# Altium PCB PCB.PcbDoc
Units mil, origin at the board's own origin, x right, y up, seen from the top; angles counter-clockwise.
Board outline 5511.81 x 3543.31 mil, 2 copper layers (Top Layer, Bottom Layer); 98 components, 67 nets, 352 pads, 95 vias.
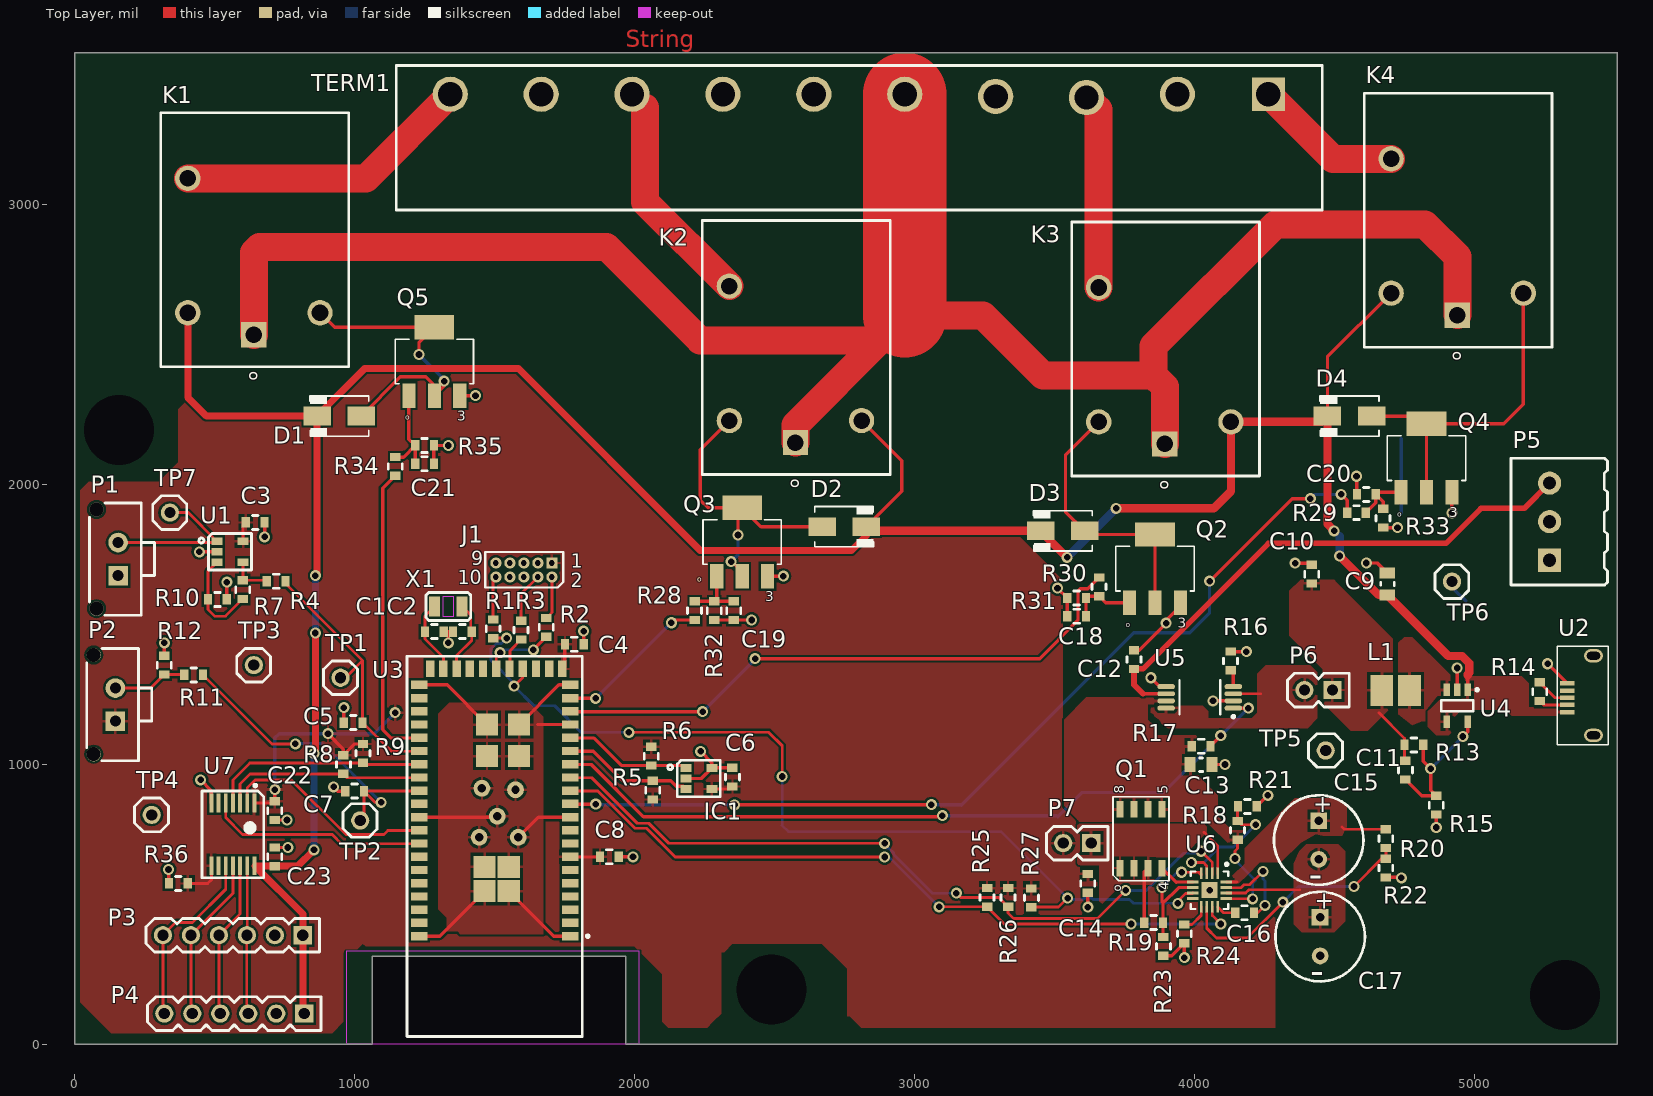
[diagram p0: Top Layer view]
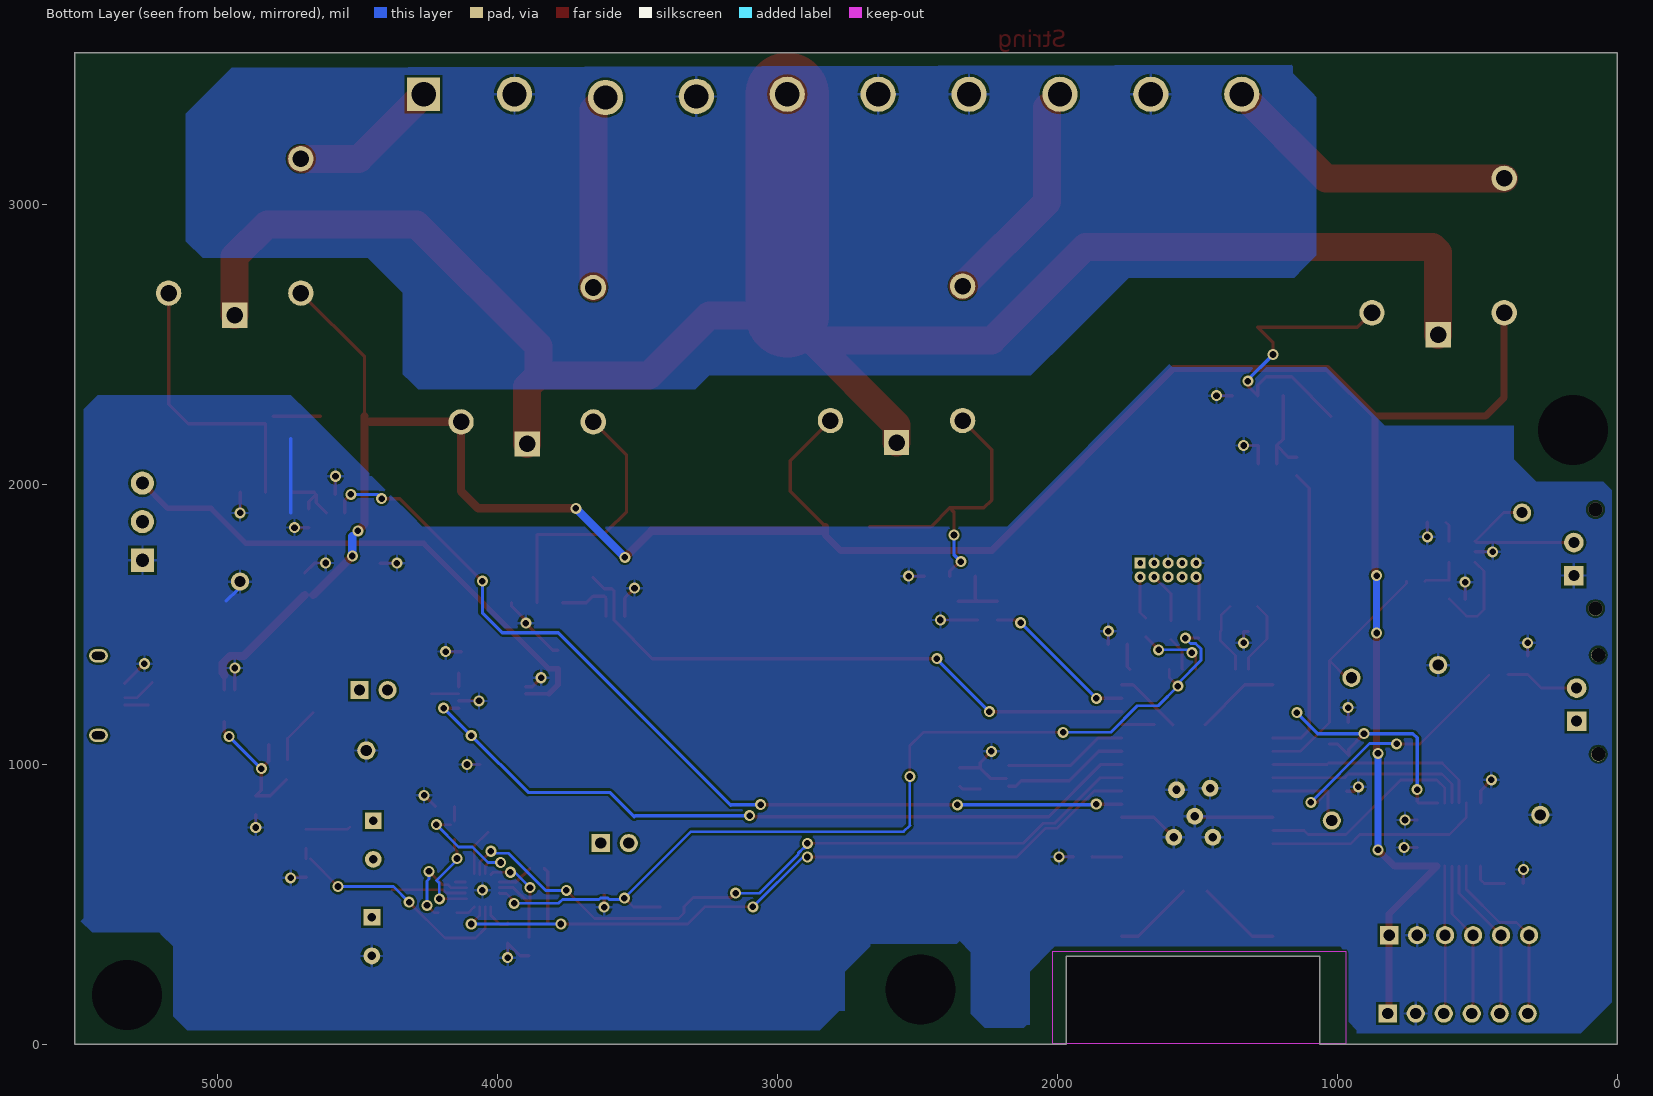
[diagram p1: Bottom Layer view, seen from below]

## Layer stack, top to bottom
Top Solder: solder mask 0.4, Solder Resist, Dk 3.5
Top Layer: signal copper 1.4
Dielectric1: dielectric 12.6, FR-4, Dk 4.8
Bottom Layer: signal copper 1.4
Bottom Solder: solder mask 0.4, Solder Resist, Dk 3.5

## Board outline
0,0 1062.99,0 1062.99,314.96 1968.5,314.96 1968.5,0 5511.81,0 5511.81,3543.31 0,3543.31 0,0

## Design rules (kind name [scope] priority, off if disabled: settings)
Clearance Mounting_Holes [InNet('No Net')] p1: gap=20
Clearance [All] p2: gap=8 except(6: SMDPad-SMDPad)
FabricationTestPointUsage TestPointUsage [All] p1: valid=0 allowmultiple=FALSE
FabricationTestpoint Testpoint [All] p1: side=3 testpointundercomponent=TRUE minsize=40 maxsize=100 preferedsize=60 minholesize=0 maxholesize=40 preferedholesize=32 testpointgrid=1 allowsidetop=TRUE allowsidebottom=TRUE usegrid=TRUE gridtolerance=0.01
HoleSize [All] p1: absolutevalues=TRUE maxlimit=250 minlimit=1 maxpercent=80.000 minpercent=20.000
MinimumAnnularRing [InNet('No Net')] p1: minimumring=50
PlaneClearance [InNet('No Net')] p1: clearance=20
PolygonConnect [All] p1: connectstyle=Relief reliefconductorwidth=10 reliefentries=4 polygonreliefangle="90 Angle" airgapwidth=10
RoutingVias [All] p1: holewidth=23.62 width=39.37 viastyle="Through Hole" minholewidth=23.62 minwidth=39.37 maxholewidth=23.62 maxwidth=39.37
SilkToSolderMaskClearance SilkscreenOverComponentPads [IsPad] p1: minsilkscreentomaskgap=10 clearancetoexposedcopper=TRUE
SolderMaskExpansion [All] p1: expansion=4
Width Width_Power [(InNet('3.3V') OR InNet('5V') OR InNet('VSW') OR InNet('VBACKUP') OR InNet('NetL1_1') OR InNet('NetC10_1') OR InNet('NetC12_1') OR InNet('NetK1_3') OR InNet('NetK2_3') OR InNet('NetK3_3') OR InNet('NetK4_3'))] p1: maxlimit=300 minlimit=10 preferedwidth=10 minimp=50.000000 maximp=50.000000 favimp=50.000000
Width Width_AC [(InNet('AC_LINE') OR InNet('AC_NEUTRAL'))] p2: maxlimit=500 minlimit=100 preferedwidth=100 minimp=50.000000 maximp=50.000000 favimp=50.000000
Width [All] p3: maxlimit=12 minlimit=8 preferedwidth=10
25 further rules are at their usual default settings.

## Classes and differential pairs
component class PAGE4_RELAYS: C18 C19 C20 C21 D1 D2 D3 D4 K1 K2 K3 K4 Q2 Q3 Q4 Q5 R28 R29 R30 R31 R32 R33 R34 R35 TERM1
component class PAGE3_POWER: C9 C10 C11 C12 C13 C14 C15 C16 C17 L1 P5 P6 P7 Q1 R13 R14 R15 R16 R17 R18 R19 R20 R21 R22 R23 R24 R25 R26 R27 TP3 TP4 TP5 TP6 U2 U4 U5 U6
component class PAGE2_ATMEL: C1 C2 C3 C4 C5 C6 C7 C8 C22 C23 IC1 J1 P1 P2 P3 P4 R1 R2 R3 R4 R5 R6 R7 R8 R9 R10 R11 R12 R36 TP1 TP2 TP7 U1 U3 U7 X1

## Components (designator, comment, footprint, x,y, rotation, side; value= is the part's Value field where it differs from the comment)
C1 "cap" 0603 1285,1475 r0 top
C2 "cap" 0603 1385,1475 r0 top
C3 "cap" 0603 645,1865 r0 top
C4 "cap" 0603 1785,1430 r0 top
C5 "cap" 0603 995,1150 r180 top
C6 "cap" 0603 2350,955 r90 top
C7 "cap" 0603 1000,905 r180 top
C8 "cap" 0603 1910,670 r0 top
C9 "cap" 0805 4690,1645 r90 top
C10 "cap" 0603 4420,1680 r90 top
C11 "cap" 0603 4755,980 r90 top
C12 "cap" 0603 3785,1375 r90 top
C13 "cap" 0805 4025,1000 r0 top
C14 "cap" 0603 3620,575 r270 top
C15 "Cap Pol" Cap8x11_5 4445,730 r270 top
C16 "cap" 0603 4180,470 r180 top
C17 "Cap Pol" Cap8x11_5 4450,385 r270 top
C18 "cap" 0603 3580,1530 r180 top
C19 "cap" 0603 2355,1550 r270 top
C20 "cap" 0603 4615,1965 r180 top
C21 "cap" 0603 1250,2075 r0 top
C22 "cap" 0603 715,835 r270 top
C23 "cap" 0603 715,670 r90 top
D1 "ds" SMAZ 945,2245 r180 top
D2 "ds" SMAZ 2750,1850 r0 top
D3 "ds" SMAZ 3530,1835 r180 top
D4 "ds" SMAZ 4555,2245 r180 top
IC1 "24LC04B" SOT-23-5 2230,950 r0 top
J1 "Header 10D" conn_10p_050mil 1705,1720 r180 top
K1 "G5LE-SPST" G5LE-SPST 965,2435 r90 top
K2 "G5LE-SPST" G5LE-SPST 2900,2050 r90 top
K3 "G5LE-SPST" G5LE-SPST 4220,2045 r90 top
K4 "G5LE-SPST" G5LE-SPST 5265,2505 r90 top
L1 "Inductor" LQH32C 4720,1265 r180 top
P1 "Header 2" conn_molex_2p_43650-0215 155,1675 r90 top
P2 "Header 2" conn_molex_2p_43650-0215 145,1155 r90 top
P3 "Header 6" HDR1X6 615,390 r180 top
P4 "Header 6" HDR1X6 620,110 r180 top
P5 "Header 3" CONN_PHOENIX_3P_1984620 5270,1730 r90 top
P6 "Header 2" HDR1X2 4494,1266 r180 top
P7 "Header 2" HDR1X2 3632,719 r180 top
Q1 "PMOS_POWER-8" SO-8 3810,735 r90 top
Q2 "NMOS-SOT-223-4" SOT-223-4 3860,1700 r0 top
Q3 "NMOS-SOT-223-4" SOT-223-4 2385,1795 r0 top
Q4 "NMOS-SOT-223-4" SOT-223-4 4830,2095 r0 top
Q5 "NMOS-SOT-223-4" SOT-223-4 1285,2440 r0 top
R1 "Res" 0603 1495,1485 r90 top
R2 "Res" 0603 1685,1490 r90 top
R3 "Res" 0603 1595,1480 r90 top
R4 "Res" 0603 720,1655 r0 top
R5 "Res" 0603 2065,908.46 r270 top
R6 "Res" 0603 2060,1030 r90 top
R7 "Res" 0603 600,1625 r90 top
R8 "Res" 0603 960,1000 r90 top
R9 "Res" 0603 1030,1040 r90 top
R10 "Res" 0603 510,1590 r180 top
R11 "Res" 0603 425,1320 r0 top
R12 "Res" 0603 320,1355 r270 top
R13 "Res" 0603 4785,1070 r180 top
R14 "Res" 0603 5235,1260 r270 top
R15 "Res" 0603 4865,855 r90 top
R16 "Res" 0603 4130,1370 r90 top
R17 "Res" 0603 4025,1065 r180 top
R18 "Res" 0603 4155,765 r270 top
R19 "Res" 0603 3855,435 r180 top
R20 "Res" 0603 4685,735 r90 top
R21 "Res" 0603 4190,850 r180 top
R22 "Res" 0603 4685,630 r90 top
R23 "Res" 0603 3890,350 r90 top
R24 "Res" 0603 3965,395 r90 top
R25 "Res" 0603 3260,525 r90 top
R26 "Res" 0603 3335,525 r90 top
R27 "Res" 0603 3418.35,523.82 r90 top
R28 "Res" 0603 2215,1550 r90 top
R29 "Res" 0603 4580,1900 r0 top
R30 "Res" 0603 3660,1635 r270 top
R31 "Res" 0603 3580,1595 r0 top
R32 "Res" 0603 2285,1550 r90 top
R33 "Res" 0603 4675,1880 r90 top
R34 "Res" 0603 1145,2065 r90 top
R35 "Res" 0603 1250,2140 r180 top
R36 "Res" 0603 370,575 r0 top
TERM1 "BARR-STRP-10" BARRIER-STRP-10 4265,3395 r180 top
TP1 "Header 1" HDR1 950,1310 r90 top
TP2 "Header 1" HDR1 1020,800 r90 top
TP3 "Header 1" HDR1 640,1355 r90 top
TP4 "Header 1" HDR1 275,820 r90 top
TP5 "Header 1" HDR1 4470,1050 r90 top
TP6 "Header 1" HDR1 4921.26,1653.54 r90 top
TP7 "Header 1" HDR1 340,1900 r90 top
U1 "MCP6V31U" SOT-23-5 555,1760 r0 top
U2 "USB_MicroB" ZX62WD1-B-5PC 5480,1085 r90 top
U3 "ATSAMW25H18-MR210PA" ATSAMW25H18-MR210PA 1770,1371 r180 top
U4 "LTC3406A" TSOT-23-5 4940,1210 r270 top
U5 "TPS2113A" TSSOP-8 4020,1240 r180 top
U6 "LTC3226" WFQFN-16 4055,551 r270 top
U7 "TXS0104EPWR" TSSOP-14 565,750 r270 top
X1 "crystal" FC-13F 1335,1565 r0 top

## Footprints (in the part's own frame and the unit in brackets; to place one, negate y for a bottom-side part, rotate by r counter-clockwise, add the part's x,y. Pads: shape width x height; smd on the part's side, far side on the other; paste and mask are expansions set on the pad)
0603 [mm] "0603"
  rect 0.75x0.95 smd: 1(-0.85,0) 2(0.85,0)
  silkscreen extent -0.25,-0.64 0.25,0.64, body extent -0.85,-0.45 0.85,0.45, height 0.81
0805 [mm] "0805 Chip, IPC Medium Density"
  rect 1x1.4 smd: 1(-1,0) 2(1,0)
  silkscreen extent -0.15,-0.63 0.15,0.6, body extent -1.07,-0.7 1.08,0.7, height 0.65
ATSAMW25H18-MR210PA [mm] "Atmel ATSAMW25H18-MR210PA"
  rect 2x2 smd: 0(4.619,5.809) 0(4.619,8.664) 0(5.567,20.923) 0(5.567,18.706) 0(7.543,8.664) 0(7.543,5.809) 0(7.749,18.706) 0(7.749,20.923)
  rect 1.5x0.754 smd mask+0.076: 1(0,24.998) 2(0,23.798) 3(0,22.598) 4(0,21.398) 5(0,20.198) 6(0,18.998) 7(0,17.798) 8(0,16.598) 9(0,15.398) 10(0,14.198) 11(0,12.998) 12(0,11.798) 13(0,10.598) 14(0,9.398) 15(0,8.198) 16(0,6.998) 17(0,5.798) 18(0,4.598) 19(0,3.398) 20(0,2.198) 32(13.7,2.198) 33(13.7,3.398) 34(13.7,4.598) 35(13.7,5.798) 36(13.7,6.998) 37(13.7,8.198) 38(13.7,9.398) 39(13.7,10.598) 40(13.7,11.798) 41(13.7,12.998) 42(13.7,14.198) 43(13.7,15.398) 44(13.7,16.598) 45(13.7,17.798) 46(13.7,18.998) 47(13.7,20.198) 48(13.7,21.398) 49(13.7,22.598) 50(13.7,23.798) 51(13.7,24.998)
  rect 0.754x1.5 smd mask+0.076: 21(0.7,0.75) 22(1.9,0.75) 23(3.1,0.75) 24(4.3,0.75) 25(5.5,0.75) 26(6.7,0.75) 27(7.9,0.75) 28(9.1,0.75) 29(10.3,0.75) 30(11.5,0.75) 31(12.7,0.75)
  silkscreen extent -1.73,-0.4 14.8,34.1, body extent -0.8,-0.07 14.54,33.7, height 1.35
BARRIER-STRP-10 [mm]
  rect 3x3 hole 2.2: 1(0,0)
  round 3.2 hole 2.2: 2(8.25,0) 3(16.5,0.3) 4(24.75,0.2) 5(33,0) 6(41.25,0) 7(49.5,0) 8(57.75,0) 9(66,0) 10(74.25,0)
  silkscreen extent -4.9,-2.6 79.15,10.5
Cap8x11_5 [mil] "big cap"
  rect 60x60 / inner round 60 / far side rect 60x60 hole 30: 1(-69,0)
  round 60 hole 30: 2(69,0)
  silkscreen extent -160,-160 160,160, body extent -158,-158 157,156, height 453
conn_10p_050mil [mil] "Connector; Header; 5x2 Position"
  rect 40x40 hole 20: 1(0,0)
  round 40 hole 20: 2(0,50) 3(50,0) 4(50,50) 5(100,0) 6(100,50) 7(150,0) 8(150,50) 9(200,0) 10(200,50)
  silkscreen extent -40,-39 238,88, body extent -10,-10 10,10, height 300
conn_molex_2p_43650-0215 [mil]
  round 51 hole 50 unplated: 0(-118.11,77.17) 0(236.22,77.17)
  rect 70x70 hole 39.37 paste+2.56 mask+3: 1(0,0)
  round 70 hole 39.37 paste+2.56 mask+3: 2(118.11,0)
  silkscreen extent -142,-130 260,102, body extent -131,-122 249,97, height 392
CONN_PHOENIX_3P_1984620 [mm] "3 Pin Terminal Block"
  rect 2.1x2.1 / inner round 2.1 / far side rect 2.1x2.1 hole 1.2: 1(0,0)
  round 2.1 hole 1.2: 2(3.5,0) 3(7,0)
  silkscreen extent -2.25,-5.25 9.25,3.5, body extent -1.73,-4.55 9.35,3.05, height 9.42
FC-13F [mm] "Crystal Oscillator"
  rect 1x1.8 smd: 1(-1.25,0) 2(1.25,0)
  Top Layer keep-out region: -0.508,-0.889 0.508,-0.889 0.508,0.889 -0.508,0.889
  silkscreen extent -2.03,-1.27 2.03,1.27, body extent -1.6,-0.8 1.7,0.8, height 0.6
G5LE-SPST [mm] "RELAY"
  rect 2.3x2.3 hole 1.5: 1(2.55,8.25)
  round 2.3 hole 1.5: 2(4.55,14.25) 3(16.75,14.25) 5(4.55,2.25)
  silkscreen extent -0.35,-0.35 22.7,16.7, body extent -0.1,-0.1 22.4,16.4, height 11
HDR1 [mil]
  round 65 hole 40: 1(0,0)
  silkscreen extent -60,-60 60,61, body extent -50,-50 50,50, height 300
HDR1X2 [mil]
  rect 65x65 hole 40: 1(0,0)
  round 65 hole 40: 2(100,0)
  silkscreen extent -60,-60 160,60, body extent -50,-50 150,50, height 300
HDR1X6 [mil] "Header, 6 pos."
  rect 65x65 hole 40: 1(-200,0)
  round 65 hole 40: 2(-100,0) 3(0,0) 4(100,0) 5(200,0) 6(300,0)
  silkscreen extent -260,-60 360,60, body extent -250,-50 350,50, height 300
LQH32C [mm] "Chip Inductor, 2-Leads, Body 3.20x2.50mm, IPC Low Density"
  rect 2.08x2.82 smd: 1(-1.265,0) 2(1.265,0)
  body extent -1.75,-1.35 1.75,1.35, height 1.7
SMAZ [mm] "Slightly different SMA package"
  rect 2.5x1.7 smd paste+0 mask+0.076: 1(2,0) 2(-2,0)
  silkscreen extent -2.68,-1.83 2.68,1.83, body extent -2.78,-1.55 2.78,1.55, height 2.3
SO-8 [mil]
  rect 59x24 smd paste+0 mask+3: 1(-105,75) 2(-105,25) 3(-105,-25) 4(-105,-75) 5(105,-75) 6(105,-25) 7(105,25) 8(105,75)
  silkscreen extent -150,-100 150,100, body extent -118,-96 118,96, height 70
SOT-23-5 [mm] "5 Pin SOT23"
  rect 1x0.7 smd paste+0 mask+0.076: 1(-1.185,0.95) 2(-1.185,0) 3(-1.185,-0.95) 4(1.185,-0.95) 5(1.185,0.95)
  silkscreen extent -2.82,-1.65 1.95,1.65, body extent -1.3,-1.45 1.3,1.45, height 1.45
SOT-223-4 [mil]
  rect 47x87 smd paste+0 mask+3: 1(-91,-122) 2(0,-122) 3(91,-122)
  rect 142x87 smd paste+0 mask+3: 4(0,122)
  silkscreen extent -140,-80 140,80, body extent -132,-136 132,141, height 71
TSOT-23-5 [mm] "SOT23, 5-Leads, Body 2.90x2.80mm, Pitch 0.95mm, IPC Low Density"
  rect 1.15x0.6 smd: 1(-1.45,0.95) 2(-1.45,0) 3(-1.45,-0.95) 4(1.45,-0.95) 5(1.45,0.95)
  silkscreen extent -1.57,-1.45 0.5,1.93, body extent -0.87,-1.45 0.87,1.45, height 1
TSSOP-8 [mm] "TSOP, 8-Leads, Body 3.00x4.40mm, Pitch 0.65mm, Thermal Pad 2.40x1.65mm, IPC Low Density"
  oval 1.6x0.45 smd: 1(-3.05,0.975) 2(-3.05,0.325) 3(-3.05,-0.325) 4(-3.05,-0.975) 5(3.05,-0.975) 6(3.05,-0.325) 7(3.05,0.325) 8(3.05,0.975)
  silkscreen extent -3.18,-1.55 1.85,1.87, body extent -2.25,-1.55 2.25,1.55, height 1.2
TSSOP-14 [mm] "14 Pin TSSOP"
  rect 1.7x0.35 smd: 1(-2.85,1.95) 2(-2.85,1.3) 3(-2.85,0.65) 4(-2.85,0) 5(-2.85,-0.65) 6(-2.85,-1.3) 7(-2.85,-1.95) 8(2.85,-1.95) 9(2.85,-1.3) 10(2.85,-0.65) 11(2.85,0) 12(2.85,0.65) 13(2.85,1.3) 14(2.85,1.95)
  silkscreen extent -4.57,-2.79 3.94,2.79, body extent -2.25,-2.55 2.25,2.55, height 1.2
WFQFN-16 [mm] "QFN, 16-Leads, Body 3.00x3.00mm, Pitch 0.50mm, Thermal Pad 1.45x1.45mm, IPC Low Density"
  rect 1.05x0.25 smd: 1(-1.525,0.75) 2(-1.525,0.25) 3(-1.525,-0.25) 4(-1.525,-0.75) 9(1.525,-0.75) 10(1.525,-0.25) 11(1.525,0.25) 12(1.525,0.75)
  rect 0.25x1.05 smd: 5(-0.75,-1.525) 6(-0.25,-1.525) 7(0.25,-1.525) 8(0.75,-1.525) 13(0.75,1.525) 14(0.25,1.525) 15(-0.25,1.525) 16(-0.75,1.525)
  rect 1.45x1.45 smd: 17(0,0)
  silkscreen extent -2.47,-1.7 1.7,1.7, body extent -1.55,-1.55 1.55,1.55, height 0.8
ZX62WD1-B-5PC [mm] "Waterproof USB Micro B"
  oval 1.2x1.7 hole 0.7 slot 1.2 at 90 deg: 0(0.49,1.35) 0(7.71,1.35)
  rect 0.4x1.3 smd: 1(2.6,3.73) 2(3.25,3.73) 3(3.9,3.73) 4(4.55,3.73) 5(5.2,3.73)
  silkscreen extent -0.35,0 8.57,4.62

## Part data
C1 C2: library part EXC143, "CAP CER 8.2PF 50V NP0 0603"
C3 C5 C7 C12 C18 C19 C20 C21: library part ECM1045XQ, "CAP CER 0.1UF 50V 10% X7R 0603"
C4 C8 C10 C14: library part EXC142, "CAP CER 10UF 16V X5R 0603"
C6 C22 C23: library part EXC144, "CAP CER 1UF 35V X7R 0603"
C9 C13: library part ECC4702XR, "CAP 4.7uF 16V X7R 0805"
C11: library part EXC140, "CAP CER 22PF 100V NP0 0603"
C15 C17: library part EXC139, "CAP 1F 2.7V THROUGH HOLE"
C16: library part EXC141, "CAP CER 2.2UF 10V X7R 0603"
D1 D2 D3 D4: library part ED93, "DIODE SCHOTTKY 100V 1A DO214AC"
IC1: library part EXM2404ST, "IC SERIAL EEPROM 4K 2.5V SOT23-5"
J1: library part EKP115, "CONN HEADER 10POS 1.27MM GOLD T/H"
K1 K2 K3 K4: library part ELME53, "RELAY GEN PURPOSE SPST 16A 5V"
L1: library part EL48, "FIXED IND 2.2UH 790MA 97 MOHM"
P1 P2: library part EKP96, "CONN HEADER 2POS 3MM VERT GOLD"
P3 P4: library part ekp19, "CONN HEADER 6POS .330 tall, TIN"
P5: library part EKP73, "CONN TERM BLOCK T/H 3POS 3.5MM"
P6 P7: library part EKP117, "CONN HEADER VERT SGL 2POS GOLD"
Q1: library part E333, "MOSFET P-CH 20V 8A 8-SOIC"
Q2 Q3 Q4 Q5: library part EXS0413NT, "MOSFET N-CH 40V 1.7A SOT223"
R1: library part ER273, "RES 39 OHM 1% 1/10W 0603 SMD"
R2 R3: library part ERE0000JP, "RES 0.0 OHM 1/10W 0603 SMD"
R4 R11 R14: library part ER264, "RES 200 OHM 1% 1/10W 0603 SMD"
R5 R6 R8 R9: library part ERE2001FP, "RES 2.00K OHM 1/10W 1% 0603 SMD"
R7: library part ERE1003FP, "RES 100K OHM 1/10W 1% 0603 SMD"
R10: library part ERE1001BP, "RES 1.0K OHM 1/10W .1% 0603 SMD"
R12 R17 R31 R32 R33 R35 R36: library part ERE1002FP, "RES 10.0K OHM 1/10W 1% 0603 SMD"
R13: library part ER265, "RES 1M OHM 1% 1/10W 0603 SMD"
R15: library part ER266, "RES 221K OHM 1% 1/10W 0603 SMD"
R16: library part ERE5230BP, "RES 523 OHM 1/10W .1% 0603 SMD"
R18: library part ER268, "RES 1.74M OHM 1% 1/10W 0603 SMD"
R19 R25 R26 R27: library part ER270, "RES 255K OHM 1% 1/10W 0603 SMD"
R20: library part ER272, "RES 3.83M OHM 1% 1/10W 0603 SMD"
R21 R22: library part ER269, "RES 1.24M OHM 1% 1/10W 0603 SMD"
R23: library part ER271, "RES 80.6K OHM 1% 1/10W 0603 SMD"
R24: library part ER267, "RES 33.2K OHM 1% 1/10W 0603 SMD"
R28 R29 R30 R34: library part ERE1001FP, "RES 1.00K OHM 1/10W 1% 0603 SMD"
TERM1: library part EKP113, "CONN BARRIER STRP 10CIRC 0.325\""
TP1 TP2 TP3 TP4 TP5 TP6 TP7: library part ekp17, "CONN HEADER 1POS .330 tall, TIN"
U1: library part E326, "IC OPAMP ZRO-DRFT 300KHZ SC70-5"
U2: library part EKP114, "CONN RCPT MICRO USB B SPLASH PRF"
U3: library part E329, "RF TXRX MODULE WIFI TRACE ANT"
U4: library part E332, "IC REG BUCK ADJ 0.6A SYNC TSOT23"
U5: library part E331, "IC OR CTRLR SRC SELECT 8TSSOP"
U6: library part E330, "IC 2CELL SUPERCAP CHARGE 16QFN"
U7: library part E334, "IC 4BIT NON-INV TRANSLTR 14TSSOP"
X1: library part EQX7, "CRYSTAL 32.768KHZ 7PF SMD"

## Free pads (board coordinates)
  round 0 hole 250 unplated: 0(157.48,2194.88) 0(2490.16,196.85) 0(5324.8,177.17)
  round 60 hole 30: 0(1455,915) 1(1575,910) 2(1510,815) 3(1445,740) 4(1585,740)

## Via types
v1: diameter 39.37, hole 23.62, Top Layer to Bottom Layer, 95 vias

## Nets (pads, with @x,y where several pads share a name; then routed paths per layer and width w, separated by ;. In a path a pad name is that pad's centre, name@x,y a point inside that pad or via, vN(x,y) a via of type N, cw(c..) or ccw(c..) an arc to the next point about the centre after c; other vN are vias at no path point)
3.3V: P6.2 U5.3 U5.8 | length 97.7
  Top Layer w10: U5.3 4237.8,1252.8
5V: C9.1 C23.1 D1.1 D2.1 D3.1 D4.1 K1.2 K2.5 K3.5 K4.2 P3.1 P4.1 U2.1 U4.1 U4.4 U7.14 | length 9845.2
  Top Layer w12: K2.5 2955,2085.55 2955,1976.26 D2.1 D2.1@2843.74,1835 ; D4.1@4455.39,2224.13 D4.1 4476.26,2456.42 K4.2 ; 4659.37,1605.63 C9.1 ; U4.1 4977.4,1318.23
  Top Layer w25: K1.2 403.98,2311.02 470,2245 D1.1 ; P4.1 815,115 P3.1 815,466.37 644.83,636.54 C23.1 796.54,636.54 v1(855,695) ; v1(855,1040) 860,1045 v1(860,1470) ; v1(860,1675) 866.26,1681.26 D1.1 ; D2.1 2828.74,1818.74 2775,1765 2235,1765 1585,2415 1036.26,2415 D1.1
  Top Layer w30: D2.1@2843.74,1835 D3.1 v1(3546.26,1740) ; v1(3721.26,1915) 4070,1915 4131.42,1976.42 K3.5 D4.1@4455.39,2224.13 ; D4.1 4476.26,1858.74 v1(4500,1835) ; v1(4520,1745) 4659.37,1605.63 ; C9.1 4907.94,1387.69 4957.68,1387.69 4982.69,1362.68 4982.69,1327.32 4977.4,1322.04 4977.4,1318.23
  Bottom Layer w12: v1(4500,1835) 4520,1815
  Bottom Layer w25: v1(855,695) v1(855,1040) ; v1(860,1470) v1(860,1675)
  Bottom Layer w30: v1(3546.26,1740) v1(3721.26,1915) ; v1(4520,1745) 4520,1815
AC_LINE: K1.1 K2.1 K3.1 K4.1 TERM1.5 | length 6951.2
  Top Layer w100: K1.1 640.2,2830.2 660,2850 1900,2850 2235,2515 2876.57,2515 ; K2.1 2575.2,2213.62 2876.57,2515 ; K3.1 3895.2,2349.8 3855,2390 ; K4.1 4940.2,2814.8 4825,2930 4290,2930 3855,2495 3855,2390 ; 2876.57,2515 2965.79,2604.21 3245.79,2604.21 3460,2390 3855,2390
  Top Layer w300: 2965.79,2604.21 TERM1.5
AC_NEUTRAL: TERM1.2 TERM1.4 TERM1.6 TERM1.7 TERM1.9
GND: C1.2 C2.1 C3.2 C4.2 C5.2 C6.2 C7.2 C8.2 C9.2 C10.2 C12.2 C13.2 C14.2 C17.2 C18.2 C19.2 C20.2 C21.2 C22.2 C23.2 IC1.2 IC1.5 J1.3 J1.5 J1.9 P1.1 P3.2 P4.2 P5.1 pad.0@1455,915 pad.1 pad.2 pad.3 pad.4 Q2.3 Q3.3 Q4.3 Q5.3 R10.1 R12.1 R15.1 R16.2 R21.1 R22.1 R23.1 R24.1 R31.1 R32.1 R33.1 R35.1 R36.1 TP3.1 TP4.1 TP5.1 TP6.1 U1.2 U2.5 U3.0 U3.1 U3.10 U3.17 U3.20 U3.32 U3.42 U3.51 U4.2 U5.2 U5.5 U6.17 U7.7 | length 4899.9
  Top Layer w12: R12.1 v1(320,1435) ; v1(335,625) 336.54,623.46 R36.1 ; v1(445,1760) U1.2 ; v1(450,945) 488.23,906.77 U7.7 ; R10.1 v1(543.46,1651.54) ; v1(678.46,1813.46) C3.2 ; C23.2 v1(761.54,703.46) ; C22.2 v1(758.46,801.54) ; v1(925,920) 940,905 C7.2 ; C5.2 v1(961.54,1203.46) ; U3.51 1304.49,386.83 U3.0@1464.92,547.26 ; U3.42 1507.02,812.02 pad.2 ; U3.32 1330.87,1284.46 U3.0@1473.03,1142.3 ; C21.2 R35.1 v1(1335,2140) ; C1.2 1335,1475 v1(1335,1435) ; Q5.3 v1(1432,2318) ; U3.0@1550.83,547.26 1711.26,386.83 U3.1 ; pad.4 1657.02,812.02 U3.10 ; U3.0@1588.15,1142.3 1730.32,1284.46 U3.20 ; 1654.54,1142.73 U3.17 ; C4.2 v1(1818.46,1476.54) ; C8.2 v1(1995,670) ; IC1.2 2239.25,950 IC1.5 ; v1(2236.22,1047.24) 2276.65,1006.81 IC1.5 ; R32.1 C19.2 v1(2418.46,1516.54) ; C6.2 2277.72,988.46 IC1.5 ; Q3.3 v1(2532,1673) ; v1(3511.54,1630) R31.1 C18.2 ; v1(3620,490) C14.2@3620,535.63 ; C12.2 3803.46,1408.46 v1(3900,1505) 3900,1515 3951,1566 Q2.3 ; v1(3845,1310) 3876.61,1278.39 U5.5 ; R23.1 3920,316.54 R24.1 v1(3965,310) ; C13.2 v1(4110,1000) ; v1(4067.2,1227.2) U5.2 ; R16.2 v1(4186.54,1403.46) ; R21.1 v1(4263.46,890) ; v1(4360.63,1719.37) C10.2@4420,1719.37 ; v1(4580,2030) 4581.54,2028.46 C20.2 ; v1(4615,1720) 4654.37,1720 C9.2 ; R33.1 v1(4726.54,1846.54) ; R22.1 4738.46,596.54 v1(4740,595) ; v1(4865,775) R15.1 ; v1(4921,1899) Q4.3 ; U4.2 v1(4940,1345) ; v1(5262.87,1360) U2.5
  Bottom Layer w12: 4740,1900 4740,2165 ; TP6.1@4930,1645 4930,1625.12 4970.47,1584.65 ; v1@4940,1339.55 v1(4940,1345)
  other v1: 4055,551
NetC1_1: C1.1 U3.30 X1.1 | length 265.9
  Top Layer w10: X1.1 1251.54,1530.75 C1.1 1251.54,1448.46 1317.24,1382.76 U3.30@1317.24,1340.47
NetC2_2: C2.2 U3.29 X1.2 | length 261.1
  Top Layer w10: U3.29@1364.49,1340.47 1364.49,1389.49 1418.46,1443.46 C2.2 1415,1478.46 1415,1534.21 X1.2
NetC10_1: C10.1 C11.2 L1.2 P6.1 R13.2 | length 206
  Top Layer w10: 4660,1185 4751.54,1093.46 R13.2 C11.2@4751.54,1016.93
NetC11_1: C11.1 R13.1 R15.2 U4.5 | length 557.6
  Top Layer w12: C11.1 4813.07,888.46 R15.2 4845,908.46 v1(4845,985) 4818.46,1011.54 R13.1 ; v1(4960,1100) 4977.4,1117.4 U4.5
  Bottom Layer w12: v1(4845,985) v1(4960,1100)
NetC12_1: C12.1 P5.3 U5.6 | length 1944.9
  Top Layer w12: 3817.2,1252.8 U5.6
  Top Layer w20: 3817.2,1252.8 3785,1285 C12.1 3816.54,1341.54 4265,1790 4900,1790 5025,1915 5179.41,1915 P5.3
NetC15_1: C15.1 R20.2 U6.16 | length 198
  Top Layer w10: U6.16 4152.53,580.53 ; 4528,777 4536.54,768.46 R20.2
NetC15_2: C15.2 C17.1 U6.14 | length 267.1
  Top Layer w10: U6.14 4184.05,541.16 4195.58,552.69 4377.31,552.69
NetC16_1: C16.1 U6.15 | length 333.7
  Top Layer w10: U6.15@4111.1,559.84 4168.16,559.84 4179.01,570.69 4198.69,570.69 v1(4246,618) ; C16.1 4226.11,470 v1(4253.06,496.94)
  Bottom Layer w10: v1(4246,618) 4246,591.06 4253.06,584 v1(4253.06,496.94)
NetC16_2: C16.2 U6.12 | length 70.7
  Top Layer w10: U6.12 4105.49,470 C16.2
NetC18_1: C18.1 Q2.1 R30.2 R31.2 | length 233
  Top Layer w12: C18.1 R31.2 3620,1601.54 R30.2 3683.54,1578 Q2.1
NetC19_1: C19.1 Q3.1 R28.2 R32.2 | length 233.3
  Top Layer w12: R28.2 R32.2 ; Q3.1 2294,1592.46 R32.2 ; C19.1 R32.2
NetC20_1: C20.1 Q4.1 R29.2 R33.2 | length 224.6
  Top Layer w12: R29.2 4648.46,1935 C20.1 4675,1938.46 R33.2 ; C20.1@4656.46,1973 Q4.1
NetC21_1: C21.1 Q5.1 R34.2 R35.2 | length 341.1
  Top Layer w12: R34.2 1175,2098.46 R35.2 ; Q5.1 1194,2162.54 R35.2 ; C21.1 R35.2
NetD1_2: D1.2 K1.5 Q5.2 Q5.4 | length 1124.5
  Top Layer w12: K1.5 928.55,2562 Q5.4 1230,2507 v1(1230,2465) ; D1.2 1163.74,2385 1255,2385 1285,2355 Q5.2 1320,2353 v1(1320,2370)
  Bottom Layer w12: v1(1230,2465) 1325,2370 v1(1320,2370)
NetD2_2: D2.2 K2.2 Q3.2 Q3.4 | length 1082.7
  Top Layer w12: K2.2 2235,2125.16 2235,1945 2263,1917 Q3.4 ; v1(2345.18,1724.82) 2350.18,1724.82 2385,1690 Q3.2 ; v1(2370,1820) 2370,1902 Q3.4 ; D2.2 2452,1850 Q3.4
  Bottom Layer w12: v1(2345.18,1724.82) 2370,1749.63 v1(2370,1820)
NetD3_2: D3.2 K3.2 Q2.2 Q2.4 | length 967.5
  Top Layer w12: K3.2 3540,2105.16 3540,1903.74 D3.2 3621.74,1822 Q2.4 Q2.2
NetD4_2: D4.2 K4.5 Q4.2 Q4.4 | length 1185.1
  Top Layer w12: D4.2 Q4.4@4802,2245 ; Q4.2 Q4.4 5107,2217 5176.42,2286.42 K4.5
NetIC1_1: IC1.1 R6.1 U3.16 | length 444.8
  Top Layer w12: U3.16@1770,1094.49 1855.51,1094.49 1953.46,996.54 R6.1 IC1.1@2174.21,996.54
NetIC1_3: IC1.3 R5.1 U3.15 | length 455.5
  Top Layer w12: U3.15@1770,1047.24 1852.76,1047.24 1958.07,941.93 R5.1 2129.95,941.93 2149.66,922.22 IC1.3@2173.72,922.22
NetJ1_2: J1.2 R2.2 | length 154.8
  Top Layer w10: R2.2 1705,1543.46 J1.2
NetJ1_4: J1.4 R3.2 | length 181.4
  Top Layer w10: R3.2 1595,1610 J1.4
NetJ1_10: J1.10 R1.2 | length 141.5
  Top Layer w10: R1.2 J1.10@1495,1660
NetK1_3: K1.3 TERM1.10 | length 1062.3
  Top Layer w100: K1.3 1041.22,3094.45 TERM1.10
NetK2_3: K2.3 TERM1.8 | length 763
  Top Layer w100: 2038.43,3347.95 2038.43,3010 K2.3
NetK3_3: K3.3 TERM1.3 | length 696.8
  Top Layer w100: TERM1.3 3658.98,3339.61 K3.3
NetK4_3: K4.3 TERM1.1 | length 534.5
  Top Layer w100: TERM1.1 4495.55,3164.45 K4.3
NetL1_1: L1.1 U4.3
NetP1_2: P1.2 TP7.1 U1.1 | length 559.9
  Top Layer w10: P1.2 U1.1@504.06,1793.11 ; TP7.1 405.75,1900 U1.1
NetP2_2: P2.2 R11.1 R12.2 | length 265.1
  Top Layer w10: P2.2 271.57,1273.11 R12.2 R11.1@390,1321.54
NetP3_3: P3.3 P4.3 U7.13 | length 523.3
  Top Layer w10: P4.3@615,115 P3.3 616.18,391.18 U7.13
NetP3_4: P3.4 P4.4 U7.12 | length 554.1
  Top Layer w10: P4.4@515,115 P3.4 590.59,465.59 U7.12
NetP3_5: P3.5 P4.5 U7.11 | length 584.9
  Top Layer w10: P4.5@415,115 P3.5 565,540 U7.11
NetP3_6: P3.6 P4.6 U7.10 | length 658
  Top Layer w10: P4.6 315,115 P3.6 360.5,435.5 420.5,435.5 539.41,554.41 U7.10
NetP7_1: P7.1 Q1.1 Q1.2 Q1.3 R19.2 U6.1 | length 367.7
  Top Layer w10: 4035.43,757.87 4084.53,708.78 U6.1
  Top Layer w12: R19.2 3821.54,616.54 Q1.3
NetQ1_4: Q1.4 U6.5 | length 129.9
  Top Layer w10: 3936.47,580.53 U6.5
  Top Layer w12: Q1.4 3935.47,579.53
NetR1_1: R1.1 R27.1 U3.24 U6.7 | length 3442.6
  Top Layer w10: R1.1 v1(1543.46,1451.54) ; v1(1570,1280) 1600.71,1310.71 U3.24@1600.71,1340.47 ; v1(1980,1115) 2480,1115 2528,1067 v1(2528,957) ; R27.1 3515.36,490.36 v1(3547.69,522.69) ; v1(3942,504) 3942,512.49 3968.91,539.39 3993.2,539.39 U6.7
  Bottom Layer w10: v1(1543.46,1451.54) 1524.61,1432.69 1506.46,1432.69 1487.31,1413.54 1487.31,1372.69 1570,1290 v1(1570,1280) 1640,1210 1715,1210 1810,1115 v1(1980,1115) ; v1(2528,957) 2528,782.88 2527.56,782.44 2550,760 3310.37,760 v1(3547.69,522.69) 3552.46,517.91 3601.68,517.91 3606.46,522.69 3633.54,522.69 3638.32,517.91 3740.87,517.91 3741.46,517.31 3768.54,517.31 3769.13,517.91 3783.04,504 v1(3942,504)
NetR2_1: R2.1 U3.26 | length 253.7
  Top Layer w10: U3.26@1506.22,1340.47 1506.22,1386.22 v1(1520,1400) ; v1(1638.46,1410) R2.1
  Bottom Layer w10: v1(1520,1400) 1530,1410 v1(1638.46,1410)
NetR3_1: R3.1 U3.25 | length 123.3
  Top Layer w10: U3.25@1553.46,1340.47 1555,1342.01 1555,1406.54 R3.1
NetR4_1: R4.1 R7.2 U1.4 | length 150.5
  Top Layer w10: R7.2 683.07,1658.46 R4.1 ; R7.2@601.65,1660.12 U1.4
NetR7_1: R7.1 R10.2 U1.3 | length 341
  Top Layer w10: U1.3 476.54,1690.79 R10.2 476.54,1553.46 500,1530 538.46,1530 R7.1
NetR14_1: R14.1 U2.3 | length 120.9
  Top Layer w10: R14.1 5289.92,1238.54 U2.3
NetR14_2: R14.2 U2.2 | length 84.6
  Top Layer w10: R14.2@5248.58,1212.95 U2.2
NetR16_1: R16.1 U5.4 | length 48.1
  Top Layer w12: U5.4 R16.1@4140.08,1326.46
NetR17_1: R17.1 U3.14 U5.1 | length 2770.4
  Top Layer w12: U3.14@1770,1000 1845,1000 2032.23,812.77 3096.24,812.77 v1(3100.39,816.93) ; R17.1@4058.46,1066.69 v1(4095,1103.23) ; U5.1 v1(4193.39,1201.61)
  Bottom Layer w12: v1(3100.39,816.93) 3508.61,816.93 3512.77,812.77 3600,900 3891.77,900 v1(4095,1103.23) v1(4193.39,1201.61)
NetR18_1: R18.1 R21.2 U6.3 | length 474.5
  Top Layer w10: v1(3990,650) 4033,650 4045.16,637.84 U6.3 ; R18.1@4168.46,785 v1(4220,785)
  Top Layer w12: R18.1 R21.2@4155,848.46
  Bottom Layer w10: v1(3990,650) 4035,650 4090,705 4140,705 v1(4220,785)
NetR19_1: R19.1 R23.2 U6.4 U6.6 | length 490.7
  Top Layer w10: 3885,506.93 v1(3885,560) ; 3945.84,560.84 U6.6 ; v1(3955,615) 4016.57,615 U6.4@4025.47,606.1
  Top Layer w12: R23.2 3888.46,385 R19.1 3888.46,503.46 3944.84,559.84
  Bottom Layer w10: v1(3885,560) 3955,630 v1(3955,615)
NetR20_1: R20.1 R22.2 U6.10 | length 871.3
  Top Layer w10: U6.10 4045.16,414.84 4080,380 4189,380 v1(4317,508) ; v1(4571,564) R22.2@4670.46,663.46 ; R22.2 R20.1
  Bottom Layer w10: v1(4317,508) 4373,564 v1(4571,564)
NetR24_2: R24.2 U6.9 | length 108.6
  Top Layer w10: R24.2 3992.46,428.46 4025.47,461.47 U6.9
  Top Layer w12: R24.2 R24.2@3965,433.43
NetR25_1: R25.1 U3.12 U6.11 | length 2596
  Top Layer w10: U3.12@1770,905.51 1869.03,905.51 2002.54,772 2043,772 2145.71,669.29 v1(2893.7,669.29) ; v1(3088.46,491.54) R25.1 3321.54,430 v1(3775,430) ; U6.11 4064.84,460.16 v1(4095,430)
  Bottom Layer w10: v1(2893.7,669.29) 2909.29,669.29 2910,670 v1(3088.46,491.54) ; v1(3775,430) v1(4095,430)
NetR26_1: R26.1 U3.13 U6.2 | length 2698.6
  Top Layer w10: U3.13@1770,952.76 1847.24,952.76 2010,790 2051,790 2122.5,718.5 v1(2893.7,718.5) ; v1(3150,540) 3165,525 3301.54,525 R26.1 3335,470 3355,450 3655,450 v1(3755,550) ; v1(4025,690) 4064.84,650.16 U6.2@4064.84,606.1
  Bottom Layer w10: v1(2893.7,718.5) 2883.96,718.5 2885.46,720 2903.48,701.98 2907.24,701.98 2926.39,682.83 2926.39,679.07 3065.46,540 v1(3150,540) ; v1(3755,550) 3828.78,550 3961.46,682.69 4017.69,682.69 v1(4025,690)
NetR28_1: R28.1 U3.19 | length 556
  Top Layer w12: U3.19 v1@1860.22,1237.22 ; v1@2131.54,1516.54 R28.1
  Bottom Layer w12: v1(1861.22,1236.22) v1(2131.54,1506.54)
NetR29_1: R29.1 U3.11 | length 3356.5
  Top Layer w12: U3.11@1770,858.27 v1(1861.73,858.27) ; v1(2358,856) v1@3060.72,856 ; v1(4055,1655) 4350,1950 v1(4415,1950) ; v1(4525,1965) 4546.54,1943.46 R29.1
  Bottom Layer w12: v1(1861.73,858.27) 1865,855 1866,856 v1(2358,856) ; v1(3061.02,856.3) 3166.07,856.3 3167.37,855 3783.69,1471.31 3983.69,1471.31 4055,1542.63 v1(4055,1655) ; v1(4415,1950) 4430,1965 v1(4525,1965)
NetR30_1: R30.1 U3.18 | length 2151
  Top Layer w12: U3.18@1770,1188.98 v1(2243.98,1188.98) ; v1(2431.1,1377.95) 3447.75,1377.95 3584.7,1514.9 3584.7,1619.5 3592.9,1627.7 3619.24,1627.7 R30.1
  Bottom Layer w12: v1(2243.98,1188.98) 2431.1,1376.1 v1(2431.1,1377.95)
NetR34_1: R34.1 U3.36 | length 1068.4
  Top Layer w12: R34.1 1100,1986.54 1100,1125 1130.51,1094.49 U3.36@1230.63,1094.49
PUMP_HALL_EFF: C5.1 R4.2 TP1.1 U3.37 | length 967.6
  Top Layer w10: R4.2 753.46,1646.54 1028.46,1371.54 ; TP1.1 966.93,1310 1028.46,1371.54 ; U3.37@1230.63,1047.24 1131.22,1047.24 C5.1 1028.46,1371.54
TM1640_DO: U3.43 U7.2 | length 766.8
  Top Layer w10: U7.2 616.18,916.18 645,945 773.78,945 968.78,750 1105,750 1118.78,763.78 U3.43@1230.63,763.78
TM1640_SCK: U3.44 U7.5 | length 781.8
  Top Layer w10: U7.5 539.41,810.59 600,750 920,750 953.46,716.54 U3.44@1230.63,716.54
VBACKUP: C3.1 C4.1 C6.1 C8.1 C14.1 C22.1 IC1.4 J1.1 P2.1 P7.2 R5.2 R6.2 R8.2 R9.2 R25.2 R26.2 R27.2 R36.2 U1.5 U3.7 U3.21 U7.1 U7.8 | length 1444.2
  Top Layer w10: R36.2 475,575 488.23,588.23 U7.8 ; U1.5 601.65,1855.12 C3.1
  Top Layer w12: U7.1 708.74,862.2 C22.1 v1(715,910) ; v1(905,1110) 960,1055 R8.2 1000,1073.46 R9.2 ; U3.21@1742.44,1340.47 1751.54,1349.57 C4.1 ; U3.7@1770,669.29 1875.83,669.29 C8.1 ; IC1.4 2341.06,912.6 C6.1
  Bottom Layer w12: v1(715,910) 715,1095 730,1110 v1(905,1110) 1070,1110 v1(1145,1185)
VSW: C13.1 Q1.5 Q1.6 Q1.7 Q1.8 R17.2 R18.2 U5.7 U6.13 | length 360.4
  Top Layer w10: U6.13@4111.1,520.47 4210.47,520.47 v1@4210,520 ; v1(4146,664) 4146,691 4155,700 R18.2 ; v1(4209.12,520) v1@4210,520 ; v1@4212,518 v1@4210,520
  Bottom Layer w10: v1(4146,664) 4141,664 4219,586 4209.12,576.12 v1(4209.12,520)
WATER_TEMP: C7.1 R11.2 TP2.1 U3.40 | length 1192.6
  Top Layer w10: R11.2 705,1073.46 v1(788.46,1073.46) ; TP2.1@1033.46,813.46 C7.1 ; v1(1095,865) 1073.46,865 C7.1 ; U3.40@1230.12,905 C7.1
  Bottom Layer w10: v1(788.46,1073.46) 790,1075 885,1075 v1(1095,865)
WTC6508_SCK: R8.1 U3.39 U7.3 | length 729
  Top Layer w10: U7.3 590.59,930.59 626.54,966.54 R8.1 973.78,952.76 U3.39@1230.63,952.76
WTC6508_SDA: R9.1 U3.38 U7.4 | length 777.1
  Top Layer w10: U7.4 565,945 625.7,1005.7 1030,1005.7 R9.1 1036.54,1000 U3.38@1230.63,1000
pads on no net: J1.6 J1.7 J1.8 P1.0 P2.0 P5.2 U2.0 U2.4 U3.2 U3.3 U3.4 U3.5 U3.6 U3.8 U3.9 U3.22 U3.23 U3.27 U3.28 U3.31 U3.33 U3.34 U3.35 U3.41 U3.45 U3.46 U3.47 U3.48 U3.49 U3.50 U6.8 U7.6 U7.9

## Polygon pours and split planes (outlines as drawn)
VBACKUP on Top Layer "VBACKUP" (solid, remove dead copper, pour order 14): 200,2010 100,2010 50,2010 20,1980 20,150 130,40 910,40 920,40 960,80 960,330 1000,330 1030,360 1040,350 1970,350 2000,350 2040,310 2100,250 2100,80 2120,60 2130,60 2260,60 2280,80 2310,110 2310,330 2320,330 2350,360 2660,360 2670,360 2740,290 2760,270 2760,100 2770,100 2810,60 4290,60 4290,550 4108.46,731.54 4044.44,795.56 3589.44,795.56 3589.44,797.58 3534.96,852.07 3530,857.03 3530,1170 3530,1660 3450,1740 3320,1870 3210,1870 2180,1870 1570,2480 1560,2480 1010,2480 1000,2470 850,2320 420,2320 390,2290 370,2270 370,2090 370,2080 300,2010
NetC15_2 on Top Layer "VSW" (solid, remove dead copper, pour order 42): 4400,715 4395,710 4390,705 4375,690 4355,645 4355,490 4355,430 4385,400 4500,400 4540,440 4540,655 4540,690 4520,710 4515,715 4425,715
NetC15_1 on Top Layer "VSW" (solid, remove dead copper, pour order 43): 4090,575 4135,575 4160,575 4190,605 4235,650 4290,650 4310,650 4380,720 4435,750 4460,745 4530,745 4540,770 4545,775 4545,850 4525,870 4515,880 4395,880 4360,880 4205,725 4180,700 4180,645 4140,605 4120,585 4090,585
NetC10_1 on Top Layer "VSW" (solid, remove dead copper, pour order 47): 4460,1340 4460,1220 4500,1180 4560,1120 4620,1120 4710,1210 4710,1320 4710,1450 4510,1650 4500,1660 4440,1660 4380,1660 4340,1620 4340,1520 4340,1460 4460,1340
3.3V on Top Layer "3V3" (solid, remove dead copper, pour order 49): 3850,1210 3845,1200 3845,1185 3855,1180 3860,1170 3875,1160 3885,1145 3905,1130 4000,1130 4405,1130 4440,1165 4440,1248 4440,1330 4415,1355 4260,1355 4255,1355 4230,1330 4225,1325 4225,1210 4225,1185 4210,1170 4205,1165 4050,1165 4050,1190 4030,1210
5V on Top Layer "5V" (solid, remove dead copper, pour order 50): 5380,1200 5390,1190 5390,1180 5385,1175 5290,1175 5135,1175 5125,1185 5115,1195 5005,1195 4955,1195 4940,1180 4925,1165 4925,1125 4925,1120 4915,1110 4910,1105 4865,1105 4845,1125 4835,1135 4835,1185 4835,1190 4850,1205 4875,1230 4955,1230 4955,1235 4965,1245 4965,1305 4975,1315 5165,1315 5170,1315 5190,1295 5195,1290 5195,1205 5210,1205 5215,1200 5310,1200
NetL1_1 on Top Layer "NetL1_1" (solid, remove dead copper, pour order 51): 4730,1340 4730,1190 4730,1180 4780,1140 4815,1155 4825,1155 4825,1190 4865,1240 4870,1245 4915,1245 4915,1320 4865,1370 4810,1425 4780,1455 4770,1455 4750,1455 4730,1435
VSW on Top Layer "VSW" (solid, remove dead copper, pour order 52): 4170,705 4195,730 4195,750 4185,760 4180,765 4135,765 4095,805 4085,815 4085,855 4085,890 4035,940 4020,955 4020,995 4020,1090 4005,1105 3855,1105 3855,1140 3845,1150 3835,1160 3835,1215 3935,1215 3940,1220 3940,1235 3935,1240 3805,1240 3640,1240 3615,1240 3530,1155 3530,945 3530,855 3580,805 3590,795 3915,795 4045,795 4060,780 4135,705 4140,705
GND on Top Layer "GND" (solid, remove dead copper, pour order 48): 1299.21,482.28 1328.74,452.76 1328.74,403.54 1368.11,403.54 1377.95,393.7 1673.23,393.7 1673.23,1171.26 1624.02,1220.47 1368.11,1220.47 1338.58,1220.47 1299.21,1181.1
NetP7_1 on Top Layer "Net97_1" (solid, remove dead copper, pour order 45): 3582.68,787.4 3582.68,639.76 3661.42,639.76 3661.42,511.81 3671.26,501.97 3740.16,570.87 3848.43,570.87 3858.27,580.71 3858.27,669.29 3956.69,669.29 4045.28,757.87 4045.28,777.56 4035.43,787.4
GND on Bottom Layer "GND" (solid, remove dead copper, pour order 16): 290,2010 60,2010 50,2010 20,1980 20,150 130,40 930,40 930,50 960,80 960,330 970,330 990,350 2010,350 2100,260 2100,70 2110,70 2120,60 2260,60 2310,110 2310,330 2350,370 2360,360 2670,360 2670,350 2760,260 2760,120 2780,120 2840,60 2850,50 5090,50 5110,50 5160,100 5160,350 5200,390 5210,400 5440,400 5450,400 5490,440 5480,450 5480,2200 5480,2270 5430,2320 4860,2320 4740,2320 4680,2260 4460,2040 4460,2030 4450,2030 4310,1890 4270,1850 3030,1850 2180,1850 1600,2430 1590,2420 1040,2420 840,2220 830,2210 370,2210 370,2090 340,2060
AC_NEUTRAL on Bottom Layer "AC_NEUTRAL" (solid, remove dead copper, pour order 53): 1160,3500 1160,3470 1090,3400 1075,3385 1075,3065 1075,2820 1120,2775 1155,2740 1500,2740 1745,2740 1950,2535 2095,2390 2320,2390 3245,2390 3295,2340 4275,2340 4285,2340 4310,2365 4340,2395 4340,2605 4340,2685 4440,2785 4465,2810 5040,2810 5055,2810 5110,2865 5115,2870 5115,3190 5115,3325 4950,3490

## Keep-outs
Keep-Out Layer:
  rectangle: 970,2 2018,332

## Other copper
Top Layer:
  text "String" at 1968.5,3562.99 h60

## Silkscreen, mask and mechanical layers (free items; w line width, h text height)
Mechanical 1:
  lines w10: 0,0 5511.81,0 5511.81,3543.31 0,3543.31 0,0
Mechanical 16:
  drawing of 1874 lines, arcs and shapes, not listed
  text "1" at -1659.65,5263.82 h70
  text "2" at 1200.35,5263.82 h70
  text "3" at 4080.35,5263.82 h70
  text "4" at 6950.35,5263.82 h70
  text "A" at -3011.65,4357.82 h70
  text "A" at 8288.35,4357.82 h70
  text "B" at -3011.65,2465.82 h70
  text "B" at 8288.35,2465.82 h70
  text "C" at -3011.65,555.82 h70
  text "C" at 8288.35,555.82 h70
  text "ENGINEER:" at 3763.35,-901.18 h45
  text "TITLE:" at 5263.35,-901.18 h45
  text "PCB DESIGNER:" at 3763.35,-1196.18 h45
  text "D" at -3011.65,-1334.18 h70
  text "D" at 8288.35,-1334.18 h70
  text "DATE:" at 3763.35,-1501.18 h45
  text "PART NO.:" at 5263.35,-1501.18 h45
  text "REV:" at 7363.35,-1501.18 h45
  text "Altium Limited" at 2463.35,-1601.18 h70
  text ".PRINT_DATE" at 3813.35,-1621.18 h70
  text "12a Rodborough Rd" at 2463.35,-1701.18 h70
  text "Frenchs Forest" at 2463.35,-1801.18 h70
  text "FILE NAME:" at 3763.35,-1801.18 h45
  text "DWG NO:" at 5263.35,-1801.18 h45
  text "SCALE:" at 7363.35,-1801.18 h45
  text "NSW 2086" at 2463.35,-1901.18 h70
  text ".PCB_FILE_NAME_NO_PATH" at 3813.35,-1921.18 h70
  text "1" at -1659.65,-2136.18 h70
  text "2" at 1200.35,-2136.18 h70
  text "3" at 4080.35,-2136.18 h70
  text "4" at 6950.35,-2136.18 h70
Drill Drawing:
  circle w1: c-2803.39,4863.93 r10
  circle w1: c-2803.39,4863.93 r16.67
  circle w1: c-2803.39,3863.93 r16.67
  lines w1: -2820.06,3947.27 -2803.39,3955.6 -2786.72,3947.27 -2795.06,3963.93 -2786.72,3980.6 -2803.39,3972.27 -2820.06,3980.6 -2811.72,3963.93 -2820.06,3947.27 ; -2820.06,4063.93 -2803.39,4047.27 -2786.72,4063.93 -2803.39,4080.6 -2820.06,4063.93 ; -2820.06,4147.27 -2786.72,4147.27 -2786.72,4180.6 -2820.06,4180.6 -2820.06,4147.27 ; -2820.06,4247.27 -2786.72,4247.27 -2786.72,4280.6 -2820.06,4280.6 -2820.06,4247.27 ; -2820.06,4380.6 -2786.72,4380.6 -2803.39,4347.27 -2820.06,4380.6 ; -2820.06,4447.27 -2820.06,4455.6 -2811.72,4463.93 -2820.06,4472.27 -2820.06,4480.6 -2811.72,4480.6 -2803.39,4472.27 -2795.06,4480.6 -2786.72,4480.6 -2786.72,4472.27 -2795.06,4463.93 -2786.72,4455.6 -2786.72,4447.27 -2795.06,4447.27 -2803.39,4455.6 -2811.72,4447.27 -2820.06,4447.27 ; -2820.06,4555.6 -2811.72,4555.6 -2803.39,4547.27 -2795.06,4555.6 -2786.72,4555.6 -2795.06,4563.93 -2786.72,4572.27 -2795.06,4572.27 -2803.39,4580.6 -2811.72,4572.27 -2820.06,4572.27 -2811.72,4563.93 -2820.06,4555.6 ; -2820.06,4755.6 -2811.72,4755.6 -2811.72,4747.27 -2795.06,4747.27 -2795.06,4755.6 -2786.72,4755.6 -2786.72,4772.27 -2795.06,4772.27 -2795.06,4780.6 -2811.72,4780.6 -2811.72,4772.27 -2820.06,4772.27 -2820.06,4755.6 ; -2813.39,4153.93 -2793.39,4153.93 -2793.39,4173.93 -2813.39,4173.93 -2813.39,4153.93
  lines w15: -2866.52,3817.27 544.58,3817.27 ; -2866.52,4917.27 544.58,4917.27 ; -2488.6,3717.27 -2488.6,5017.27 ; -2012.72,3717.27 -2012.72,5017.27 ; -1104.99,3717.27 -1104.99,5017.27 ; -757.07,3717.27 -757.07,5017.27 ; -257.2,3717.27 -257.2,5017.27 ; -2866.52,3717.27 544.58,3717.27 544.58,5017.27 -2866.52,5017.27 -2866.52,3717.27
  text "Symbol" at -2806.52,4947.27 h48
  text "Hit Count" at -2458.6,4947.27 h48
  text "Finished Hole Size" at -1982.72,4947.27 h48
  text "Plated" at -1074.99,4947.27 h48
  text "Hole Type" at -727.07,4947.27 h48
  text "Physical Length" at -227.2,4947.27 h48
  text "2" at -2458.6,4847.27 h40
  text "27.56mil (0.700mm)" at -1982.72,4847.27 h40
  text "PTH" at -1074.99,4847.27 h40
  text "Slot" at -727.07,4847.27 h40
  text "47.24mil (1.200mm)" at -227.2,4847.27 h40
  text "3" at -2458.6,4747.27 h40
  text "47.24mil (1.200mm)" at -1982.72,4747.27 h40
  text "PTH" at -1074.99,4747.27 h40
  text "Round" at -727.07,4747.27 h40
  text "H" at -2811.72,4655.6 h33.33
  text "3" at -2458.6,4647.27 h40
  text "250.00mil (6.350mm)" at -1982.72,4647.27 h40
  text "NPTH" at -1074.99,4647.27 h40
  text "Round" at -727.07,4647.27 h40
  text "4" at -2458.6,4547.27 h40
  text "39.37mil (1.000mm)" at -1982.72,4547.27 h40
  text "PTH" at -1074.99,4547.27 h40
  text "Round" at -727.07,4547.27 h40
  text "4" at -2458.6,4447.27 h40
  text "50.00mil (1.270mm)" at -1982.72,4447.27 h40
  text "NPTH" at -1074.99,4447.27 h40
  text "Round" at -727.07,4447.27 h40
  text "9" at -2458.6,4347.27 h40
  text "30.00mil (0.762mm)" at -1982.72,4347.27 h40
  text "PTH" at -1074.99,4347.27 h40
  text "Round" at -727.07,4347.27 h40
  text "10" at -2458.6,4247.27 h40
  text "20.00mil (0.508mm)" at -1982.72,4247.27 h40
  text "PTH" at -1074.99,4247.27 h40
  text "Round" at -727.07,4247.27 h40
  text "10" at -2458.6,4147.27 h40
  text "86.61mil (2.200mm)" at -1982.72,4147.27 h40
  text "PTH" at -1074.99,4147.27 h40
  text "Round" at -727.07,4147.27 h40
  text "16" at -2458.6,4047.27 h40
  text "59.06mil (1.500mm)" at -1982.72,4047.27 h40
  text "PTH" at -1074.99,4047.27 h40
  text "Round" at -727.07,4047.27 h40
  text "23" at -2458.6,3947.27 h40
  text "40.00mil (1.016mm)" at -1982.72,3947.27 h40
  text "PTH" at -1074.99,3947.27 h40
  text "Round" at -727.07,3947.27 h40
  text "95" at -2458.6,3847.27 h40
  text "23.62mil (0.600mm)" at -1982.72,3847.27 h40
  text "PTH" at -1074.99,3847.27 h40
  text "Round" at -727.07,3847.27 h40
  text "179 Total" at -2458.6,3747.27 h40
  text "Slot definitions :" at -2806.52,3643.95 h40
  text "Rout Path Length" at -2108.72,3643.95 h40
  text "= Calculated from tool start centre position to tool end centre position." at -1444.25,3643.95 h40
  text "Physical Length" at -2108.72,3570.64 h40
  text "= Rout Path Length + Tool Size = Slot length as defined in the PCB layout" at -1484.24,3570.64 h40

## Dimensions
0,0 to 5511.81,0 on Drill Drawing
0,3543.31 to 0,0 on Drill Drawing

## Text inside footprints (layer, text, board x,y; h text height)
C15: Mechanical 2 "+" at 4420,820 h80; Mechanical 2 "-" at 4410,545 h100; Top Overlay "-" at 4410,560 h100; Top Overlay "+" at 4425,830 h60
C17: Mechanical 2 "+" at 4425,475 h80; Mechanical 2 "-" at 4415,200 h100; Top Overlay "-" at 4415,215 h100; Top Overlay "+" at 4430,485 h60
J1: Top Overlay "9" at 1417.32,1712.6 h50; Top Overlay "10" at 1368.11,1643.7 h50; Top Overlay "2" at 1771.65,1633.86 h50; Top Overlay "1" at 1771.65,1702.76 h50
K1: Top Overlay "o" at 653.98,2372.01 h40 r90
K2: Top Overlay "o" at 2588.98,1987.01 h40 r90
K3: Top Overlay "o" at 3908.98,1982.01 h40 r90
K4: Top Overlay "o" at 4953.98,2442.01 h40 r90
Q1: Mechanical 2 "8" at 3750,895 h35 r90; Mechanical 2 "5" at 3905,895 h35 r90; Mechanical 2 "4" at 3910,550 h35 r90; Mechanical 2 "o" at 3740,545 h30 r90; Top Overlay "8" at 3750,895 h35 r90; Top Overlay "5" at 3905,895 h35 r90; Top Overlay "4" at 3910,550 h35 r90; Top Overlay "o" at 3740,545 h30 r90
Q2: Mechanical 2 "o" at 3756,1491 h20; Mechanical 2 "3" at 3942,1489 h35; Top Overlay "o" at 3756,1491 h20; Top Overlay "3" at 3942,1489 h35
Q3: Mechanical 2 "o" at 2281,1586 h20; Mechanical 2 "3" at 2467,1584 h35; Top Overlay "o" at 2224.41,1653.54 h20; Top Overlay "3" at 2467,1584 h35
Q4: Mechanical 2 "o" at 4726,1886 h20; Mechanical 2 "3" at 4912,1884 h35; Top Overlay "o" at 4726,1886 h20; Top Overlay "3" at 4912,1884 h35
Q5: Mechanical 2 "o" at 1181,2231 h20; Mechanical 2 "3" at 1367,2229 h35; Top Overlay "o" at 1181,2231 h20; Top Overlay "3" at 1367,2229 h35